# Altium PCB PCB2.PcbDoc (part 2 of 2)
Units mm, origin at the board's own origin, x right, y up, seen from the top; angles counter-clockwise.
Board outline 126 x 36 mm, 2 copper layers (Top Layer, Bottom Layer); 354 components, 48 nets, 750 pads, 362 vias.
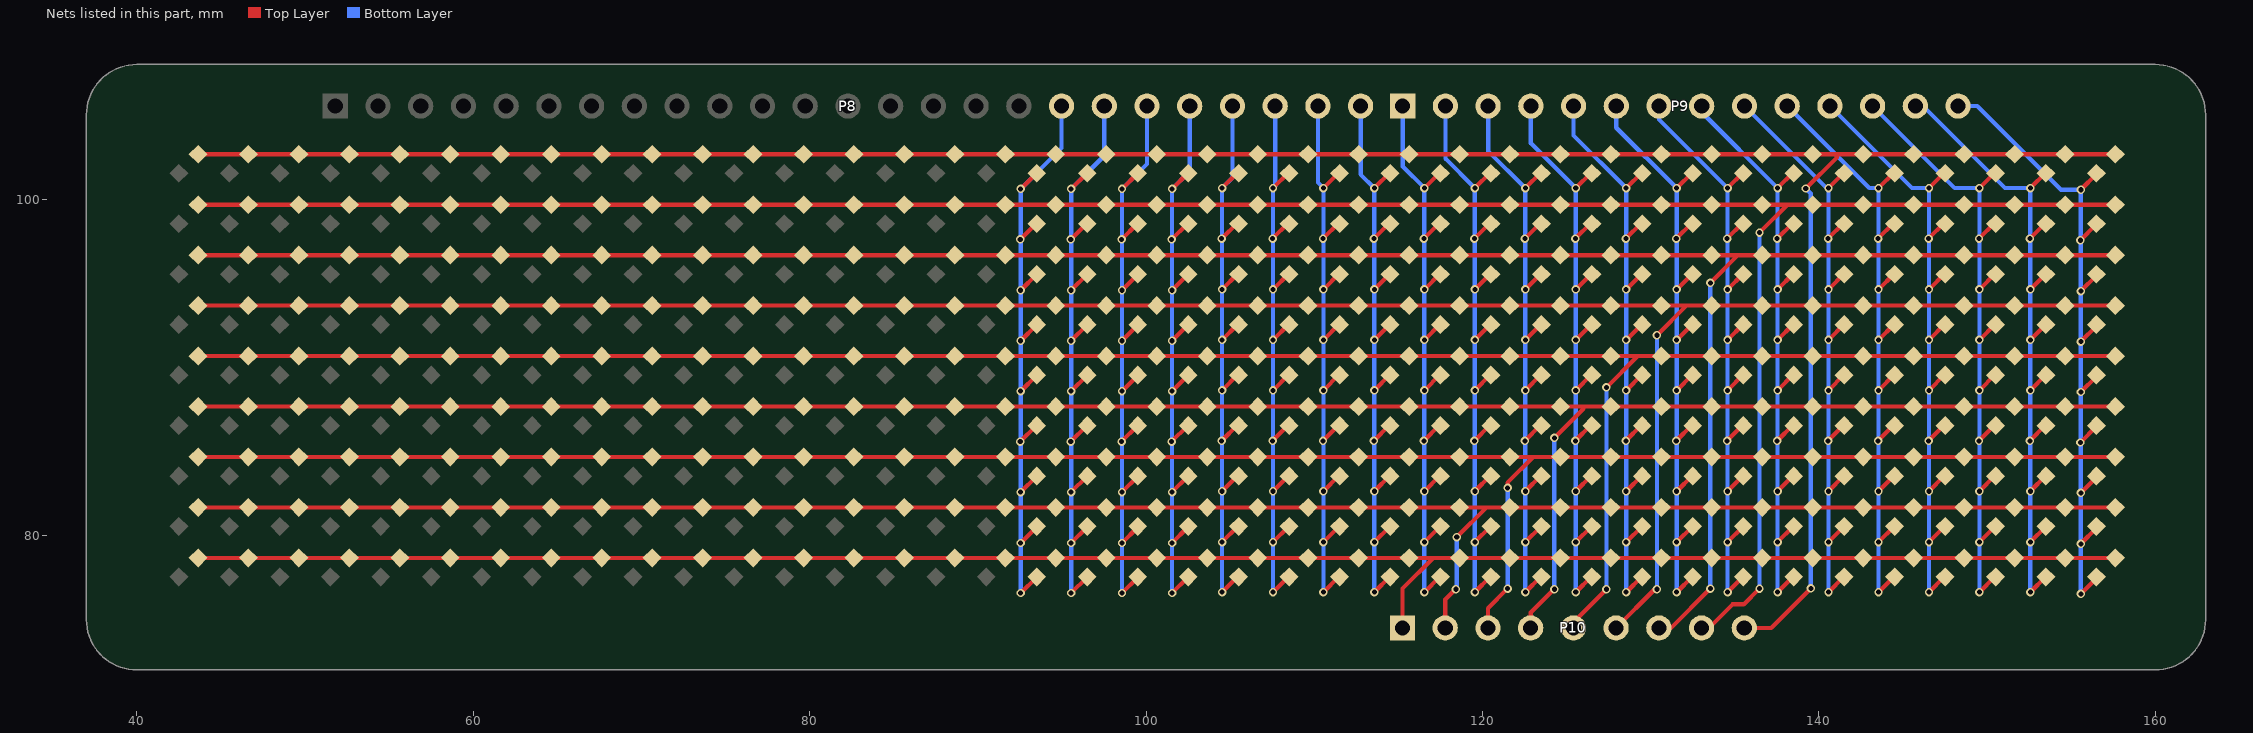
[diagram p2: the nets of this part, all layers, seen from the top]

## Via types
v1: diameter 0.5, hole 0.3, Top Layer to Bottom Layer, 358 vias
v2: diameter 3, hole 3, Top Layer to Bottom Layer, 4 vias

## Nets (pads, with @x,y where several pads share a name; then routed paths per layer and width w, separated by ;. In a path a pad name is that pad's centre, name@x,y a point inside that pad or via, vN(x,y) a via of type N, cw(c..) or ccw(c..) an arc to the next point about the centre after c; other vN are vias at no path point) (continued)
CS18: C174.2 C213.2 C252.2 C291.2 C330.2 C369.2 C408.2 C447.2 C486.2 P8.18 | length 41.8
  Top Layer w0.254: v1(92.525,85.575) C369.2@93.457,86.507 ; v1(92.525,97.6) C213.2@93.457,98.532 ; v1(92.55,76.575) C486.2@93.482,77.507 ; v1(92.55,79.55) C447.2@93.482,80.482 ; v1(92.55,82.575) C408.2@93.482,83.507 ; v1(92.55,88.575) C330.2@93.482,89.507 ; v1(92.55,91.575) C291.2@93.482,92.507 ; v1(92.55,94.575) C252.2@93.482,95.507 ; v1(92.55,100.6) C174.2@93.482,101.532
  Bottom Layer w0.254: v1(92.55,76.575) v1(92.55,79.55) v1(92.55,82.575) v1(92.55,88.575) v1(92.55,91.575) v1(92.55,94.575) v1@92.55,100.55 ; v1(92.55,100.6) 94.98,103.03 P8.18@94.98,105.525
CS19: C175.2 C214.2 C253.2 C292.2 C331.2 C370.2 C409.2 C448.2 C487.2 P8.19 | length 41.6
  Top Layer w0.254: v1(95.525,85.575) C370.2@96.457,86.507 ; v1(95.525,97.6) C214.2@96.457,98.532 ; v1(95.55,76.575) C487.2@96.482,77.507 ; v1(95.55,79.55) C448.2@96.482,80.482 ; v1(95.55,82.575) C409.2@96.482,83.507 ; v1(95.55,88.575) C331.2@96.482,89.507 ; v1(95.55,91.575) C292.2@96.482,92.507 ; v1(95.55,94.575) C253.2@96.482,95.507 ; v1(95.55,100.6) C175.2@96.482,101.532
  Bottom Layer w0.254: v1(95.55,76.575) v1(95.55,79.55) v1(95.55,82.575) v1(95.55,88.575) v1(95.55,91.575) v1(95.55,94.575) v1@95.55,100.55 ; v1(95.55,100.6) 97.52,102.57 P8.19@97.52,105.525
CS20: C176.2 C215.2 C254.2 C293.2 C332.2 C371.2 C410.2 C449.2 C488.2 P8.20 | length 41.4
  Top Layer w0.254: v1(98.55,85.575) C371.2@99.482,86.507 ; v1(98.55,97.6) C215.2@99.482,98.532 ; v1(98.575,76.575) C488.2@99.507,77.507 ; v1(98.575,79.55) C449.2@99.507,80.482 ; v1(98.575,82.575) C410.2@99.507,83.507 ; v1(98.575,88.575) C332.2@99.507,89.507 ; v1(98.575,91.575) C293.2@99.507,92.507 ; v1(98.575,94.575) C254.2@99.507,95.507 ; v1(98.575,100.6) C176.2@99.507,101.532
  Bottom Layer w0.254: v1(98.575,76.575) v1(98.575,79.55) v1(98.575,82.575) v1(98.575,88.575) v1(98.575,91.575) v1(98.575,94.575) v1@98.575,100.55 ; v1(98.575,100.6) 100.06,102.085 P8.20@100.06,105.525
CS21: C177.2 C216.2 C255.2 C294.2 C333.2 C372.2 C411.2 C450.2 C489.2 P8.21 | length 41.2
  Top Layer w0.254: v1(101.525,85.575) C372.2@102.457,86.507 ; v1(101.525,97.6) C216.2@102.457,98.532 ; v1(101.55,76.575) C489.2@102.482,77.507 ; v1(101.55,79.55) C450.2@102.482,80.482 ; v1(101.55,82.575) C411.2@102.482,83.507 ; v1(101.55,88.575) C333.2@102.482,89.507 ; v1(101.55,91.575) C294.2@102.482,92.507 ; v1(101.55,94.575) C255.2@102.482,95.507 ; v1(101.55,100.6) C177.2@102.482,101.532
  Bottom Layer w0.254: v1(101.55,76.575) v1(101.55,79.55) v1(101.55,82.575) v1(101.55,88.575) v1(101.55,91.575) v1(101.55,94.575) v1@101.55,100.55 ; v1(101.55,100.6) 102.6,101.65 P8.21@102.6,105.525
CS22: C178.2 C217.2 C256.2 C295.2 C334.2 C373.2 C412.2 C451.2 C490.2 P8.22 | length 41
  Top Layer w0.254: v1(104.5,85.625) C373.2@105.432,86.557 ; v1(104.5,97.65) C217.2@105.432,98.582 ; v1(104.525,76.625) C490.2@105.457,77.557 ; v1(104.525,79.6) C451.2@105.457,80.532 ; v1(104.525,82.625) C412.2@105.457,83.557 ; v1(104.525,88.625) C334.2@105.457,89.557 ; v1(104.525,91.625) C295.2@105.457,92.557 ; v1(104.525,94.625) C256.2@105.457,95.557 ; v1(104.525,100.65) C178.2@105.457,101.582
  Bottom Layer w0.254: v1(104.525,76.625) v1(104.525,79.6) v1(104.525,82.625) v1(104.525,88.625) v1(104.525,91.625) v1(104.525,94.625) v1@104.525,100.6 ; v1(104.525,100.65) 105.14,101.265 P8.22@105.14,105.525
CS23: C179.2 C218.2 C257.2 C296.2 C335.2 C374.2 C413.2 C452.2 C491.2 P8.23 | length 40.8
  Top Layer w0.254: v1(107.525,85.625) C374.2@108.457,86.557 ; v1(107.525,97.65) C218.2@108.457,98.582 ; v1(107.55,76.625) C491.2@108.482,77.557 ; v1(107.55,79.6) C452.2@108.482,80.532 ; v1(107.55,82.625) C413.2@108.482,83.557 ; v1(107.55,88.625) C335.2@108.482,89.557 ; v1(107.55,91.625) C296.2@108.482,92.557 ; v1(107.55,94.625) C257.2@108.482,95.557 ; v1(107.55,100.65) C179.2@108.482,101.582
  Bottom Layer w0.254: v1(107.55,76.625) v1(107.55,79.6) v1(107.55,82.625) v1(107.55,88.625) v1(107.55,91.625) v1(107.55,94.625) v1@107.55,100.6 ; v1(107.55,100.65) 107.68,100.78 P8.23@107.68,105.525
CS24: C180.2 C219.2 C258.2 C297.2 C336.2 C375.2 C414.2 C453.2 C492.2 P8.24 | length 40.9
  Top Layer w0.254: v1(110.525,85.625) C375.2@111.457,86.557 ; v1(110.525,97.65) C219.2@111.457,98.582 ; v1(110.55,76.625) C492.2@111.482,77.557 ; v1(110.55,79.6) C453.2@111.482,80.532 ; v1(110.55,82.625) C414.2@111.482,83.557 ; v1(110.55,88.625) C336.2@111.482,89.557 ; v1(110.55,91.625) C297.2@111.482,92.557 ; v1(110.55,94.625) C258.2@111.482,95.557 ; v1(110.55,100.65) C180.2@111.482,101.582
  Bottom Layer w0.254: P8.24@110.22,105.525 110.22,100.98 v1(110.55,100.65) ; v1(110.55,76.625) v1(110.55,79.6) v1(110.55,82.625) v1(110.55,88.625) v1(110.55,91.625) v1(110.55,94.625) v1@110.55,100.6
CS25: C181.2 C220.2 C259.2 C298.2 C337.2 C376.2 C415.2 C454.2 C493.2 P8.25 | length 41.1
  Top Layer w0.254: v1(113.55,85.625) C376.2@114.482,86.557 ; v1(113.55,97.65) C220.2@114.482,98.582 ; v1(113.575,76.625) C493.2@114.507,77.557 ; v1(113.575,79.6) C454.2@114.507,80.532 ; v1(113.575,82.625) C415.2@114.507,83.557 ; v1(113.575,88.625) C337.2@114.507,89.557 ; v1(113.575,91.625) C298.2@114.507,92.557 ; v1(113.575,94.625) C259.2@114.507,95.557 ; v1(113.575,100.65) C181.2@114.507,101.582
  Bottom Layer w0.254: P8.25@112.76,105.525 112.76,101.465 v1(113.575,100.65) ; v1(113.575,76.625) v1(113.575,79.6) v1(113.575,82.625) v1(113.575,88.625) v1(113.575,91.625) v1(113.575,94.625) v1@113.575,100.6
CS26: C182.2 C221.2 C260.2 C299.2 C338.2 C377.2 C416.2 C455.2 C494.2 P9.1 | length 41.3
  Top Layer w0.254: v1(116.525,85.625) C377.2@117.457,86.557 ; v1(116.525,97.65) C221.2@117.457,98.582 ; v1(116.55,76.625) C494.2@117.482,77.557 ; v1(116.55,79.6) C455.2@117.482,80.532 ; v1(116.55,82.625) C416.2@117.482,83.557 ; v1(116.55,88.625) C338.2@117.482,89.557 ; v1(116.55,91.625) C299.2@117.482,92.557 ; v1(116.55,94.625) C260.2@117.482,95.557 ; v1(116.55,100.65) C182.2@117.482,101.582
  Bottom Layer w0.254: P9.1@115.26,105.525 115.26,101.94 v1(116.55,100.65) ; v1(116.55,76.625) v1(116.55,79.6) v1(116.55,82.625) v1(116.55,88.625) v1(116.55,91.625) v1(116.55,94.625) v1@116.55,100.6
CS27: C183.2 C222.2 C261.2 C300.2 C339.2 C378.2 C417.2 C456.2 C495.2 P9.2 | length 41.4
  Top Layer w0.254: v1(119.525,85.625) C378.2@120.457,86.557 ; v1(119.525,97.65) C222.2@120.457,98.582 ; v1(119.55,76.625) C495.2@120.482,77.557 ; v1(119.55,79.6) C456.2@120.482,80.532 ; v1(119.55,82.625) C417.2@120.482,83.557 ; v1(119.55,88.625) C339.2@120.482,89.557 ; v1(119.55,91.625) C300.2@120.482,92.557 ; v1(119.55,94.625) C261.2@120.482,95.557 ; v1(119.55,100.65) C183.2@120.482,101.582
  Bottom Layer w0.254: P9.2@117.8,105.525 117.8,102.4 v1(119.55,100.65) ; v1(119.55,76.625) v1(119.55,79.6) v1(119.55,82.625) v1(119.55,88.625) v1(119.55,91.625) v1(119.55,94.625) v1@119.55,100.6
CS28: C184.2 C223.2 C262.2 C301.2 C340.2 C379.2 C418.2 C457.2 C496.2 P9.3 | length 41.6
  Top Layer w0.254: v1(122.525,85.625) C379.2@123.457,86.557 ; v1(122.525,97.65) C223.2@123.457,98.582 ; v1(122.55,76.625) C496.2@123.482,77.557 ; v1(122.55,79.6) C457.2@123.482,80.532 ; v1(122.55,82.625) C418.2@123.482,83.557 ; v1(122.55,88.625) C340.2@123.482,89.557 ; v1(122.55,91.625) C301.2@123.482,92.557 ; v1(122.55,94.625) C262.2@123.482,95.557 ; v1(122.55,100.65) C184.2@123.482,101.582
  Bottom Layer w0.254: P9.3@120.34,105.525 120.34,102.86 v1(122.55,100.65) ; v1(122.55,76.625) v1(122.55,79.6) v1(122.55,82.625) v1(122.55,88.625) v1(122.55,91.625) v1(122.55,94.625) v1@122.55,100.6
CS29: C185.2 C224.2 C263.2 C302.2 C341.2 C380.2 C419.2 C458.2 C497.2 P9.4 | length 41.8
  Top Layer w0.254: v1(125.525,85.625) C380.2@126.457,86.557 ; v1(125.525,97.65) C224.2@126.457,98.582 ; v1(125.55,76.625) C497.2@126.482,77.557 ; v1(125.55,79.6) C458.2@126.482,80.532 ; v1(125.55,82.625) C419.2@126.482,83.557 ; v1(125.55,88.625) C341.2@126.482,89.557 ; v1(125.55,91.625) C302.2@126.482,92.557 ; v1(125.55,94.625) C263.2@126.482,95.557 ; v1(125.55,100.65) C185.2@126.482,101.582
  Bottom Layer w0.254: P9.4@122.88,105.525 122.88,103.32 v1(125.55,100.65) ; v1(125.55,76.625) v1(125.55,79.6) v1(125.55,82.625) v1(125.55,88.625) v1(125.55,91.625) v1(125.55,94.625) v1@125.55,100.6
CS30: C186.2 C225.2 C264.2 C303.2 C342.2 C381.2 C420.2 C459.2 C498.2 P9.5 | length 42
  Top Layer w0.254: v1(128.525,85.625) C381.2@129.457,86.557 ; v1(128.525,97.65) C225.2@129.457,98.582 ; v1(128.55,76.625) C498.2@129.482,77.557 ; v1(128.55,79.6) C459.2@129.482,80.532 ; v1(128.55,82.625) C420.2@129.482,83.557 ; v1(128.55,88.625) C342.2@129.482,89.557 ; v1(128.55,91.625) C303.2@129.482,92.557 ; v1(128.55,94.625) C264.2@129.482,95.557 ; v1(128.55,100.65) C186.2@129.482,101.582
  Bottom Layer w0.254: P9.5@125.42,105.525 125.42,103.78 v1(128.55,100.65) ; v1(128.55,76.625) v1(128.55,79.6) v1(128.55,82.625) v1(128.55,88.625) v1(128.55,91.625) v1(128.55,94.625) v1@128.55,100.6
CS31: C187.2 C226.2 C265.2 C304.2 C343.2 C382.2 C421.2 C460.2 C499.2 P9.6 | length 42.2
  Top Layer w0.254: v1(131.525,85.625) C382.2@132.457,86.557 ; v1(131.525,97.65) C226.2@132.457,98.582 ; v1(131.55,76.625) C499.2@132.482,77.557 ; v1(131.55,79.6) C460.2@132.482,80.532 ; v1(131.55,82.625) C421.2@132.482,83.557 ; v1(131.55,88.625) C343.2@132.482,89.557 ; v1(131.55,91.625) C304.2@132.482,92.557 ; v1(131.55,94.625) C265.2@132.482,95.557 ; v1(131.55,100.65) C187.2@132.482,101.582
  Bottom Layer w0.254: P9.6@127.96,105.525 127.96,104.24 v1(131.55,100.65) ; v1(131.55,76.625) v1(131.55,79.6) v1(131.55,82.625) v1(131.55,88.625) v1(131.55,91.625) v1(131.55,94.625) v1@131.55,100.6
CS32: C188.2 C227.2 C266.2 C305.2 C344.2 C383.2 C422.2 C461.2 C500.2 P9.7 | length 42.4
  Top Layer w0.254: v1(134.55,85.625) C383.2@135.482,86.557 ; v1(134.55,97.65) C227.2@135.482,98.582 ; v1(134.575,76.625) C500.2@135.507,77.557 ; v1(134.575,79.6) C461.2@135.507,80.532 ; v1(134.575,82.625) C422.2@135.507,83.557 ; v1(134.575,88.625) C344.2@135.507,89.557 ; v1(134.575,91.625) C305.2@135.507,92.557 ; v1(134.575,94.625) C266.2@135.507,95.557 ; v1(134.575,100.65) C188.2@135.507,101.582
  Bottom Layer w0.254: P9.7@130.5,105.525 130.5,104.725 v1(134.575,100.65) ; v1(134.575,76.625) v1(134.575,79.6) v1(134.575,82.625) v1(134.575,88.625) v1(134.575,91.625) v1(134.575,94.625) v1@134.575,100.6
CS33: C189.2 C228.2 C267.2 C306.2 C345.2 C384.2 C423.2 C462.2 C501.2 P9.8 | length 42.6
  Top Layer w0.254: v1(137.525,85.625) C384.2@138.457,86.557 ; v1(137.525,97.65) C228.2@138.457,98.582 ; v1(137.55,76.625) C501.2@138.482,77.557 ; v1(137.55,79.6) C462.2@138.482,80.532 ; v1(137.55,82.625) C423.2@138.482,83.557 ; v1(137.55,88.625) C345.2@138.482,89.557 ; v1(137.55,91.625) C306.2@138.482,92.557 ; v1(137.55,94.625) C267.2@138.482,95.557 ; v1(137.55,100.65) C189.2@138.482,101.582
  Bottom Layer w0.254: P9.8@133.04,105.525 133.04,105.16 v1(137.55,100.65) ; v1(137.55,76.625) v1(137.55,79.6) v1(137.55,82.625) v1(137.55,88.625) v1(137.55,91.625) v1(137.55,94.625) v1@137.55,100.6
CS34: C190.2 C229.2 C268.2 C307.2 C346.2 C385.2 C424.2 C463.2 C502.2 P9.9 | length 42.9
  Top Layer w0.254: v1(140.55,85.625) C385.2@141.482,86.557 ; v1(140.55,97.65) C229.2@141.482,98.582 ; v1(140.575,76.625) C502.2@141.507,77.557 ; v1(140.575,79.6) C463.2@141.507,80.532 ; v1(140.575,82.625) C424.2@141.507,83.557 ; v1(140.575,88.625) C346.2@141.507,89.557 ; v1(140.575,91.625) C307.2@141.507,92.557 ; v1(140.575,94.625) C268.2@141.507,95.557 ; v1(140.575,100.65) C190.2@141.507,101.582
  Bottom Layer w0.254: P9.9@135.58,105.525 140.455,100.65 v1(140.575,100.65) ; v1(140.575,76.625) v1(140.575,79.6) v1(140.575,82.625) v1(140.575,88.625) v1(140.575,91.625) v1(140.575,94.625) v1@140.575,100.6
CS35: C191.2 C230.2 C269.2 C308.2 C347.2 C386.2 C425.2 C464.2 C503.2 P9.10 | length 43.3
  Top Layer w0.254: v1(143.525,85.625) C386.2@144.457,86.557 ; v1(143.525,97.65) C230.2@144.457,98.582 ; v1(143.55,76.625) C503.2@144.482,77.557 ; v1(143.55,79.6) C464.2@144.482,80.532 ; v1(143.55,82.625) C425.2@144.482,83.557 ; v1(143.55,88.625) C347.2@144.482,89.557 ; v1(143.55,91.625) C308.2@144.482,92.557 ; v1(143.55,94.625) C269.2@144.482,95.557 ; v1(143.55,100.65) C191.2@144.482,101.582
  Bottom Layer w0.254: P9.10@138.12,105.525 142.995,100.65 v1(143.55,100.65) ; v1(143.55,76.625) v1(143.55,79.6) v1(143.55,82.625) v1(143.55,88.625) v1(143.55,91.625) v1(143.55,94.625) v1@143.55,100.6
CS36: C192.2 C231.2 C270.2 C309.2 C348.2 C387.2 C426.2 C465.2 C504.2 P9.11 | length 43.8
  Top Layer w0.254: v1(146.525,85.625) C387.2@147.457,86.557 ; v1(146.525,97.65) C231.2@147.457,98.582 ; v1(146.55,76.625) C504.2@147.482,77.557 ; v1(146.55,79.6) C465.2@147.482,80.532 ; v1(146.55,82.625) C426.2@147.482,83.557 ; v1(146.55,88.625) C348.2@147.482,89.557 ; v1(146.55,91.625) C309.2@147.482,92.557 ; v1(146.55,94.625) C270.2@147.482,95.557 ; v1(146.55,100.65) C192.2@147.482,101.582
  Bottom Layer w0.254: P9.11@140.66,105.525 145.535,100.65 v1(146.55,100.65) ; v1(146.55,76.625) v1(146.55,79.6) v1(146.55,82.625) v1(146.55,88.625) v1(146.55,91.625) v1(146.55,94.625) v1@146.55,100.6
CS37: C193.2 C232.2 C271.2 C310.2 C349.2 C388.2 C427.2 C466.2 C505.2 P9.12 | length 44.2
  Top Layer w0.254: v1(149.525,85.625) C388.2@150.457,86.557 ; v1(149.525,97.65) C232.2@150.457,98.582 ; v1(149.55,76.625) C505.2@150.482,77.557 ; v1(149.55,79.6) C466.2@150.482,80.532 ; v1(149.55,82.625) C427.2@150.482,83.557 ; v1(149.55,88.625) C349.2@150.482,89.557 ; v1(149.55,91.625) C310.2@150.482,92.557 ; v1(149.55,94.625) C271.2@150.482,95.557 ; v1(149.55,100.65) C193.2@150.482,101.582
  Bottom Layer w0.254: P9.12@143.2,105.525 148.075,100.65 v1(149.55,100.65) ; v1(149.55,76.625) v1(149.55,79.6) v1(149.55,82.625) v1(149.55,88.625) v1(149.55,91.625) v1(149.55,94.625) v1@149.55,100.6
CS38: C194.2 C233.2 C272.2 C311.2 C350.2 C389.2 C428.2 C467.2 C506.2 P9.13 | length 44.7
  Top Layer w0.254: v1(152.55,85.625) C389.2@153.482,86.557 ; v1(152.55,97.65) C233.2@153.482,98.582 ; v1(152.575,76.625) C506.2@153.507,77.557 ; v1(152.575,79.6) C467.2@153.507,80.532 ; v1(152.575,82.625) C428.2@153.507,83.557 ; v1(152.575,88.625) C350.2@153.507,89.557 ; v1(152.575,91.625) C311.2@153.507,92.557 ; v1(152.575,94.625) C272.2@153.507,95.557 ; v1(152.575,100.65) C194.2@153.507,101.582
  Bottom Layer w0.254: P9.13@145.74,105.525 146.2,105.525 151.075,100.65 v1(152.575,100.65) ; v1(152.575,76.625) v1(152.575,79.6) v1(152.575,82.625) v1(152.575,88.625) v1(152.575,91.625) v1(152.575,94.625) v1@152.575,100.6
CS39: C195.2 C234.2 C273.2 C312.2 C351.2 C390.2 C429.2 C468.2 C507.2 P9.14 | length 45.2
  Top Layer w0.254: v1(155.55,85.525) C390.2@156.482,86.457 ; v1(155.55,97.55) C234.2@156.482,98.482 ; v1(155.575,76.525) C507.2@156.507,77.457 ; v1(155.575,79.5) C468.2@156.507,80.432 ; v1(155.575,82.525) C429.2@156.507,83.457 ; v1(155.575,88.525) C351.2@156.507,89.457 ; v1(155.575,91.525) C312.2@156.507,92.457 ; v1(155.575,94.525) C273.2@156.507,95.457 ; v1(155.575,100.55) C195.2@156.507,101.482
  Bottom Layer w0.254: P9.14@148.28,105.525 149.425,105.525 154.4,100.55 v1(155.575,100.55) ; v1(155.575,76.525) v1(155.575,79.5) v1(155.575,82.525) v1(155.575,88.525) v1(155.575,91.525) v1(155.575,94.525) v1@155.575,100.5
SW1: C157.1 C158.1 C159.1 C160.1 C161.1 C162.1 C163.1 C164.1 C165.1 C166.1 C167.1 C168.1 C169.1 C170.1 C171.1 C172.1 C173.1 C174.1 C175.1 C176.1 C177.1 C178.1 C179.1 C180.1 C181.1 C182.1 C183.1 C184.1 C185.1 C186.1 C187.1 C188.1 C189.1 C190.1 C191.1 C192.1 C193.1 C194.1 C195.1 P10.9 | length 145.6
  Top Layer w0.254: C157.1@43.639,102.664 C158.1@46.639,102.664 C159.1@49.639,102.664 C160.1@52.639,102.664 C161.1@55.639,102.664 C162.1@58.639,102.664 C163.1@61.639,102.664 C164.1@64.639,102.664 C165.1@67.639,102.664 C166.1@70.639,102.664 C167.1@73.639,102.664 C168.1@76.639,102.664 C169.1@79.639,102.664 C170.1@82.639,102.664 C171.1@85.639,102.664 C172.1@88.639,102.664 C173.1@91.639,102.664 C174.1@94.639,102.664 C175.1@97.639,102.664 C176.1@100.639,102.664 C177.1@103.639,102.664 C178.1@106.639,102.664 C179.1@109.639,102.664 C180.1@112.639,102.664 C181.1@115.639,102.664 C182.1@118.639,102.664 C183.1@121.639,102.664 C184.1@124.639,102.664 C185.1@127.639,102.664 C186.1@130.639,102.664 C187.1@133.639,102.664 C188.1@136.639,102.664 C189.1@139.639,102.664 141.075,102.664 ; P10.9@135.57,74.5 137.175,74.5 v1(139.525,76.85) ; v1(139.225,100.625) 141.075,102.475 141.075,102.664 ; C195.1@157.639,102.664 C194.1@154.639,102.664 C193.1@151.639,102.664 C192.1@148.639,102.664 C191.1@145.639,102.664 C190.1@142.639,102.664 141.075,102.664
  Bottom Layer w0.254: v1(139.225,100.625) 139.525,100.325 v1(139.525,76.85)
SW2: C196.1 C197.1 C198.1 C199.1 C200.1 C201.1 C202.1 C203.1 C204.1 C205.1 C206.1 C207.1 C208.1 C209.1 C210.1 C211.1 C212.1 C213.1 C214.1 C215.1 C216.1 C217.1 C218.1 C219.1 C220.1 C221.1 C222.1 C223.1 C224.1 C225.1 C226.1 C227.1 C228.1 C229.1 C230.1 C231.1 C232.1 C233.1 C234.1 P10.8 | length 141.9
  Top Layer w0.254: C196.1@43.639,99.664 C197.1@46.639,99.664 C198.1@49.639,99.664 C199.1@52.639,99.664 C200.1@55.639,99.664 C201.1@58.639,99.664 C202.1@61.639,99.664 C203.1@64.639,99.664 C204.1@67.639,99.664 C205.1@70.639,99.664 C206.1@73.639,99.664 C207.1@76.639,99.664 C208.1@79.639,99.664 C209.1@82.639,99.664 C210.1@85.639,99.664 C211.1@88.639,99.664 C212.1@91.639,99.664 C213.1@94.639,99.664 C214.1@97.639,99.664 C215.1@100.639,99.664 C216.1@103.639,99.664 C217.1@106.639,99.664 C218.1@109.639,99.664 C219.1@112.639,99.664 C220.1@115.639,99.664 C221.1@118.639,99.664 C222.1@121.639,99.664 C223.1@124.639,99.664 C224.1@127.639,99.664 C225.1@130.639,99.664 C226.1@133.639,99.664 C227.1@136.639,99.664 138.12,99.664 ; P10.8@133.03,74.5 133.475,74.5 134.875,75.9 135.536,75.9 v1(136.475,76.839) ; v1(136.475,98) 138.12,99.645 138.12,99.664 ; C234.1@157.639,99.664 C233.1@154.639,99.664 C232.1@151.639,99.664 C231.1@148.639,99.664 C230.1@145.639,99.664 C229.1@142.639,99.664 C228.1@139.639,99.664 138.12,99.664
  Bottom Layer w0.254: v1(136.475,76.839) v1(136.475,98)
SW3: C235.1 C236.1 C237.1 C238.1 C239.1 C240.1 C241.1 C242.1 C243.1 C244.1 C245.1 C246.1 C247.1 C248.1 C249.1 C250.1 C251.1 C252.1 C253.1 C254.1 C255.1 C256.1 C257.1 C258.1 C259.1 C260.1 C261.1 C262.1 C263.1 C264.1 C265.1 C266.1 C267.1 C268.1 C269.1 C270.1 C271.1 C272.1 C273.1 P10.7 | length 138.5
  Top Layer w0.254: C235.1@43.639,96.664 C236.1@46.639,96.664 C237.1@49.639,96.664 C238.1@52.639,96.664 C239.1@55.639,96.664 C240.1@58.639,96.664 C241.1@61.639,96.664 C242.1@64.639,96.664 C243.1@67.639,96.664 C244.1@70.639,96.664 C245.1@73.639,96.664 C246.1@76.639,96.664 C247.1@79.639,96.664 C248.1@82.639,96.664 C249.1@85.639,96.664 C250.1@88.639,96.664 C251.1@91.639,96.664 C252.1@94.639,96.664 C253.1@97.639,96.664 C254.1@100.639,96.664 C255.1@103.639,96.664 C256.1@106.639,96.664 C257.1@109.639,96.664 C258.1@112.639,96.664 C259.1@115.639,96.664 C260.1@118.639,96.664 C261.1@121.639,96.664 C262.1@124.639,96.664 C263.1@127.639,96.664 C264.1@130.639,96.664 C265.1@133.639,96.664 135.2,96.664 ; P10.7@130.49,74.5 131.211,74.5 v1(133.55,76.839) ; v1(133.55,95.014) 135.2,96.664 ; C273.1@157.639,96.664 C272.1@154.639,96.664 C271.1@151.639,96.664 C270.1@148.639,96.664 C269.1@145.639,96.664 C268.1@142.639,96.664 C267.1@139.639,96.664 C266.1@136.639,96.664 135.2,96.664
  Bottom Layer w0.254: v1(133.55,76.839) v1(133.55,95.014)
SW4: C274.1 C275.1 C276.1 C277.1 C278.1 C279.1 C280.1 C281.1 C282.1 C283.1 C284.1 C285.1 C286.1 C287.1 C288.1 C289.1 C290.1 C291.1 C292.1 C293.1 C294.1 C295.1 C296.1 C297.1 C298.1 C299.1 C300.1 C301.1 C302.1 C303.1 C304.1 C305.1 C306.1 C307.1 C308.1 C309.1 C310.1 C311.1 C312.1 P10.6 | length 135
  Top Layer w0.254: C274.1@43.639,93.664 C275.1@46.639,93.664 C276.1@49.639,93.664 C277.1@52.639,93.664 C278.1@55.639,93.664 C279.1@58.639,93.664 C280.1@61.639,93.664 C281.1@64.639,93.664 C282.1@67.639,93.664 C283.1@70.639,93.664 C284.1@73.639,93.664 C285.1@76.639,93.664 C286.1@79.639,93.664 C287.1@82.639,93.664 C288.1@85.639,93.664 C289.1@88.639,93.664 C290.1@91.639,93.664 C291.1@94.639,93.664 C292.1@97.639,93.664 C293.1@100.639,93.664 C294.1@103.639,93.664 C295.1@106.639,93.664 C296.1@109.639,93.664 C297.1@112.639,93.664 C298.1@115.639,93.664 C299.1@118.639,93.664 C300.1@121.639,93.664 C301.1@124.639,93.664 C302.1@127.639,93.664 C303.1@130.639,93.664 132.139,93.664 ; P10.6@127.95,74.5 130.25,76.8 v1(130.375,76.8) ; v1(130.375,91.9) 132.139,93.664 ; C312.1@157.639,93.664 C311.1@154.639,93.664 C310.1@151.639,93.664 C309.1@148.639,93.664 C308.1@145.639,93.664 C307.1@142.639,93.664 C306.1@139.639,93.664 C305.1@136.639,93.664 C304.1@133.639,93.664 132.139,93.664
  Bottom Layer w0.254: v1(130.375,76.8) v1(130.375,91.9)
SW5: C313.1 C314.1 C315.1 C316.1 C317.1 C318.1 C319.1 C320.1 C321.1 C322.1 C323.1 C324.1 C325.1 C326.1 C327.1 C328.1 C329.1 C330.1 C331.1 C332.1 C333.1 C334.1 C335.1 C336.1 C337.1 C338.1 C339.1 C340.1 C341.1 C342.1 C343.1 C344.1 C345.1 C346.1 C347.1 C348.1 C349.1 C350.1 C351.1 P10.5 | length 131.7
  Top Layer w0.254: C313.1@43.639,90.664 C314.1@46.639,90.664 C315.1@49.639,90.664 C316.1@52.639,90.664 C317.1@55.639,90.664 C318.1@58.639,90.664 C319.1@61.639,90.664 C320.1@64.639,90.664 C321.1@67.639,90.664 C322.1@70.639,90.664 C323.1@73.639,90.664 C324.1@76.639,90.664 C325.1@79.639,90.664 C326.1@82.639,90.664 C327.1@85.639,90.664 C328.1@88.639,90.664 C329.1@91.639,90.664 C330.1@94.639,90.664 C331.1@97.639,90.664 C332.1@100.639,90.664 C333.1@103.639,90.664 C334.1@106.639,90.664 C335.1@109.639,90.664 C336.1@112.639,90.664 C337.1@115.639,90.664 C338.1@118.639,90.664 C339.1@121.639,90.664 C340.1@124.639,90.664 C341.1@127.639,90.664 129.15,90.664 ; P10.5@125.41,74.5 125.41,74.835 v1(127.375,76.8) ; v1(127.375,88.8) 129.15,90.575 129.15,90.664 ; C351.1@157.639,90.664 C350.1@154.639,90.664 C349.1@151.639,90.664 C348.1@148.639,90.664 C347.1@145.639,90.664 C346.1@142.639,90.664 C345.1@139.639,90.664 C344.1@136.639,90.664 C343.1@133.639,90.664 C342.1@130.639,90.664 129.15,90.664
  Bottom Layer w0.254: v1(127.375,76.8) v1(127.375,88.8)
SW6: C352.1 C353.1 C354.1 C355.1 C356.1 C357.1 C358.1 C359.1 C360.1 C361.1 C362.1 C363.1 C364.1 C365.1 C366.1 C367.1 C368.1 C369.1 C370.1 C371.1 C372.1 C373.1 C374.1 C375.1 C376.1 C377.1 C378.1 C379.1 C380.1 C381.1 C382.1 C383.1 C384.1 C385.1 C386.1 C387.1 C388.1 C389.1 C390.1 P10.4 | length 128.5
  Top Layer w0.254: C352.1@43.639,87.664 C353.1@46.639,87.664 C354.1@49.639,87.664 C355.1@52.639,87.664 C356.1@55.639,87.664 C357.1@58.639,87.664 C358.1@61.639,87.664 C359.1@64.639,87.664 C360.1@67.639,87.664 C361.1@70.639,87.664 C362.1@73.639,87.664 C363.1@76.639,87.664 C364.1@79.639,87.664 C365.1@82.639,87.664 C366.1@85.639,87.664 C367.1@88.639,87.664 C368.1@91.639,87.664 C369.1@94.639,87.664 C370.1@97.639,87.664 C371.1@100.639,87.664 C372.1@103.639,87.664 C373.1@106.639,87.664 C374.1@109.639,87.664 C375.1@112.639,87.664 C376.1@115.639,87.664 C377.1@118.639,87.664 C378.1@121.639,87.664 C379.1@124.639,87.664 126,87.664 ; P10.4@122.87,74.5 122.87,75.42 124.25,76.8 v1(124.275,76.8) ; v1(124.275,85.8) 126,87.525 126,87.664 ; C390.1@157.639,87.664 C389.1@154.639,87.664 C388.1@151.639,87.664 C387.1@148.639,87.664 C386.1@145.639,87.664 C385.1@142.639,87.664 C384.1@139.639,87.664 C383.1@136.639,87.664 C382.1@133.639,87.664 C381.1@130.639,87.664 C380.1@127.639,87.664 126,87.664
  Bottom Layer w0.254: v1(124.275,76.8) v1(124.275,85.8)
SW7: C391.1 C392.1 C393.1 C394.1 C395.1 C396.1 C397.1 C398.1 C399.1 C400.1 C401.1 C402.1 C403.1 C404.1 C405.1 C406.1 C407.1 C408.1 C409.1 C410.1 C411.1 C412.1 C413.1 C414.1 C415.1 C416.1 C417.1 C418.1 C419.1 C420.1 C421.1 C422.1 C423.1 C424.1 C425.1 C426.1 C427.1 C428.1 C429.1 P10.3 | length 125.3
  Top Layer w0.254: C391.1@43.639,84.664 C392.1@46.639,84.664 C393.1@49.639,84.664 C394.1@52.639,84.664 C395.1@55.639,84.664 C396.1@58.639,84.664 C397.1@61.639,84.664 C398.1@64.639,84.664 C399.1@67.639,84.664 C400.1@70.639,84.664 C401.1@73.639,84.664 C402.1@76.639,84.664 C403.1@79.639,84.664 C404.1@82.639,84.664 C405.1@85.639,84.664 C406.1@88.639,84.664 C407.1@91.639,84.664 C408.1@94.639,84.664 C409.1@97.639,84.664 C410.1@100.639,84.664 C411.1@103.639,84.664 C412.1@106.639,84.664 C413.1@109.639,84.664 C414.1@112.639,84.664 C415.1@115.639,84.664 C416.1@118.639,84.664 C417.1@121.639,84.664 123.025,84.664 ; P10.3@120.33,74.5 120.33,75.669 v1(121.5,76.839) ; v1(121.5,82.825) 121.5,83.139 123.025,84.664 ; C429.1@157.639,84.664 C428.1@154.639,84.664 C427.1@151.639,84.664 C426.1@148.639,84.664 C425.1@145.639,84.664 C424.1@142.639,84.664 C423.1@139.639,84.664 C422.1@136.639,84.664 C421.1@133.639,84.664 C420.1@130.639,84.664 C419.1@127.639,84.664 C418.1@124.639,84.664 123.025,84.664
  Bottom Layer w0.254: v1(121.5,76.839) v1(121.5,82.825)
SW8: C430.1 C431.1 C432.1 C433.1 C434.1 C435.1 C436.1 C437.1 C438.1 C439.1 C440.1 C441.1 C442.1 C443.1 C444.1 C445.1 C446.1 C447.1 C448.1 C449.1 C450.1 C451.1 C452.1 C453.1 C454.1 C455.1 C456.1 C457.1 C458.1 C459.1 C460.1 C461.1 C462.1 C463.1 C464.1 C465.1 C466.1 C467.1 C468.1 P10.2 | length 122.2
  Top Layer w0.254: C430.1@43.639,81.664 C431.1@46.639,81.664 C432.1@49.639,81.664 C433.1@52.639,81.664 C434.1@55.639,81.664 C435.1@58.639,81.664 C436.1@61.639,81.664 C437.1@64.639,81.664 C438.1@67.639,81.664 C439.1@70.639,81.664 C440.1@73.639,81.664 C441.1@76.639,81.664 C442.1@79.639,81.664 C443.1@82.639,81.664 C444.1@85.639,81.664 C445.1@88.639,81.664 C446.1@91.639,81.664 C447.1@94.639,81.664 C448.1@97.639,81.664 C449.1@100.639,81.664 C450.1@103.639,81.664 C451.1@106.639,81.664 C452.1@109.639,81.664 C453.1@112.639,81.664 C454.1@115.639,81.664 C455.1@118.639,81.664 120.239,81.664 ; P10.2@117.79,74.5 117.79,76.19 118.4,76.8 v1(118.425,76.8) ; v1(118.475,79.9) 120.239,81.664 ; C468.1@157.639,81.664 C467.1@154.639,81.664 C466.1@151.639,81.664 C465.1@148.639,81.664 C464.1@145.639,81.664 C463.1@142.639,81.664 C462.1@139.639,81.664 C461.1@136.639,81.664 C460.1@133.639,81.664 C459.1@130.639,81.664 C458.1@127.639,81.664 C457.1@124.639,81.664 C456.1@121.639,81.664 120.239,81.664
  Bottom Layer w0.254: v1(118.425,76.8) 118.475,76.85 v1(118.475,79.9)
SW9: C469.1 C470.1 C471.1 C472.1 C473.1 C474.1 C475.1 C476.1 C477.1 C478.1 C479.1 C480.1 C481.1 C482.1 C483.1 C484.1 C485.1 C486.1 C487.1 C488.1 C489.1 C490.1 C491.1 C492.1 C493.1 C494.1 C495.1 C496.1 C497.1 C498.1 C499.1 C500.1 C501.1 C502.1 C503.1 C504.1 C505.1 C506.1 C507.1 P10.1 | length 118.9
  Top Layer w0.254: C469.1@43.639,78.664 C470.1@46.639,78.664 C471.1@49.639,78.664 C472.1@52.639,78.664 C473.1@55.639,78.664 C474.1@58.639,78.664 C475.1@61.639,78.664 C476.1@64.639,78.664 C477.1@67.639,78.664 C478.1@70.639,78.664 C479.1@73.639,78.664 C480.1@76.639,78.664 C481.1@79.639,78.664 C482.1@82.639,78.664 C483.1@85.639,78.664 C484.1@88.639,78.664 C485.1@91.639,78.664 C486.1@94.639,78.664 C487.1@97.639,78.664 C488.1@100.639,78.664 C489.1@103.639,78.664 C490.1@106.639,78.664 C491.1@109.639,78.664 C492.1@112.639,78.664 C493.1@115.639,78.664 117.075,78.664 ; P10.1@115.25,74.5 115.25,76.839 117.075,78.664 ; C507.1@157.639,78.664 C506.1@154.639,78.664 C505.1@151.639,78.664 C504.1@148.639,78.664 C503.1@145.639,78.664 C502.1@142.639,78.664 C501.1@139.639,78.664 C500.1@136.639,78.664 C499.1@133.639,78.664 C498.1@130.639,78.664 C497.1@127.639,78.664 C496.1@124.639,78.664 C495.1@121.639,78.664 C494.1@118.639,78.664 117.075,78.664
copper on no net:
  other v2: 40,75 160,75 40,105 160,105

## Polygon pours and split planes (outlines as drawn)
no net on Top Layer "GND" (solid, pour order 0): 163,94.9 162.975,74.799 cw(c160.039,74.938) 159.9,72.002 40.1,72.002 cw(c39.952,74.947) 37.007,74.799 37,105.125 cw(c39.988,105.012) 40.1,108 160.1,108 cw(c160.025,105.05) 162.975,104.975 163,103.125
no net on Bottom Layer "GND" (solid, pour order 2): 162.975,74.54 cw(c160.435,74.54) 160.435,72 39.54,72 cw(c39.54,74.54) 37,74.54 37,105.46 cw(c39.54,105.46) 39.54,108 160.435,108 cw(c160.435,105.46) 162.975,105.46

## Silkscreen, mask and mechanical layers (free items; w line width, h text height)
Mechanical 1:
  the board outline again, w0.254
Mechanical 14:
  lines w0.254: 40,107.975 160,107.975 ; 40,108 ccw(c40,105) 37,105 37,75 ccw(c40,75) 40,72 160,72 ccw(c160,75) 163,75 163,105 ccw(c160,105) 160,108